# Altium PCB ArmbandControllerHardware PCB_RevA.PcbDoc
Units mil, origin at the board's own origin, x right, y up, seen from the top; angles counter-clockwise.
Board outline 1000 x 2205 mil, 6 copper layers (Sig 1, GND 1, Sig 2, PWR (3V3), GND 2, Sig 3), stack 62.874 mil thick; 48 components, 40 nets, 265 pads, 59 vias.
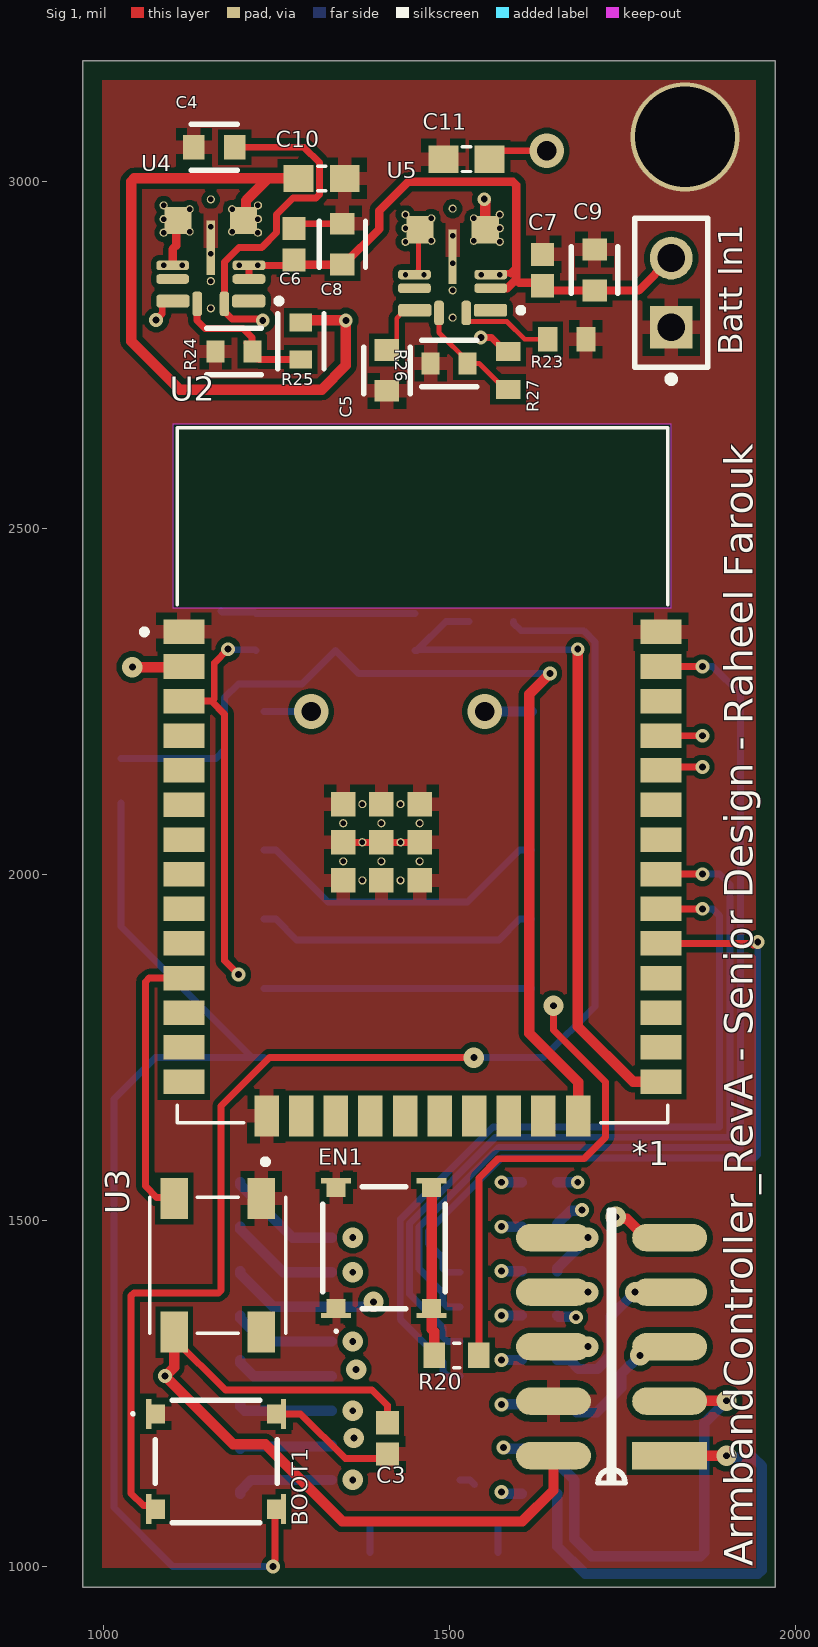
[diagram p0: Sig 1 view]
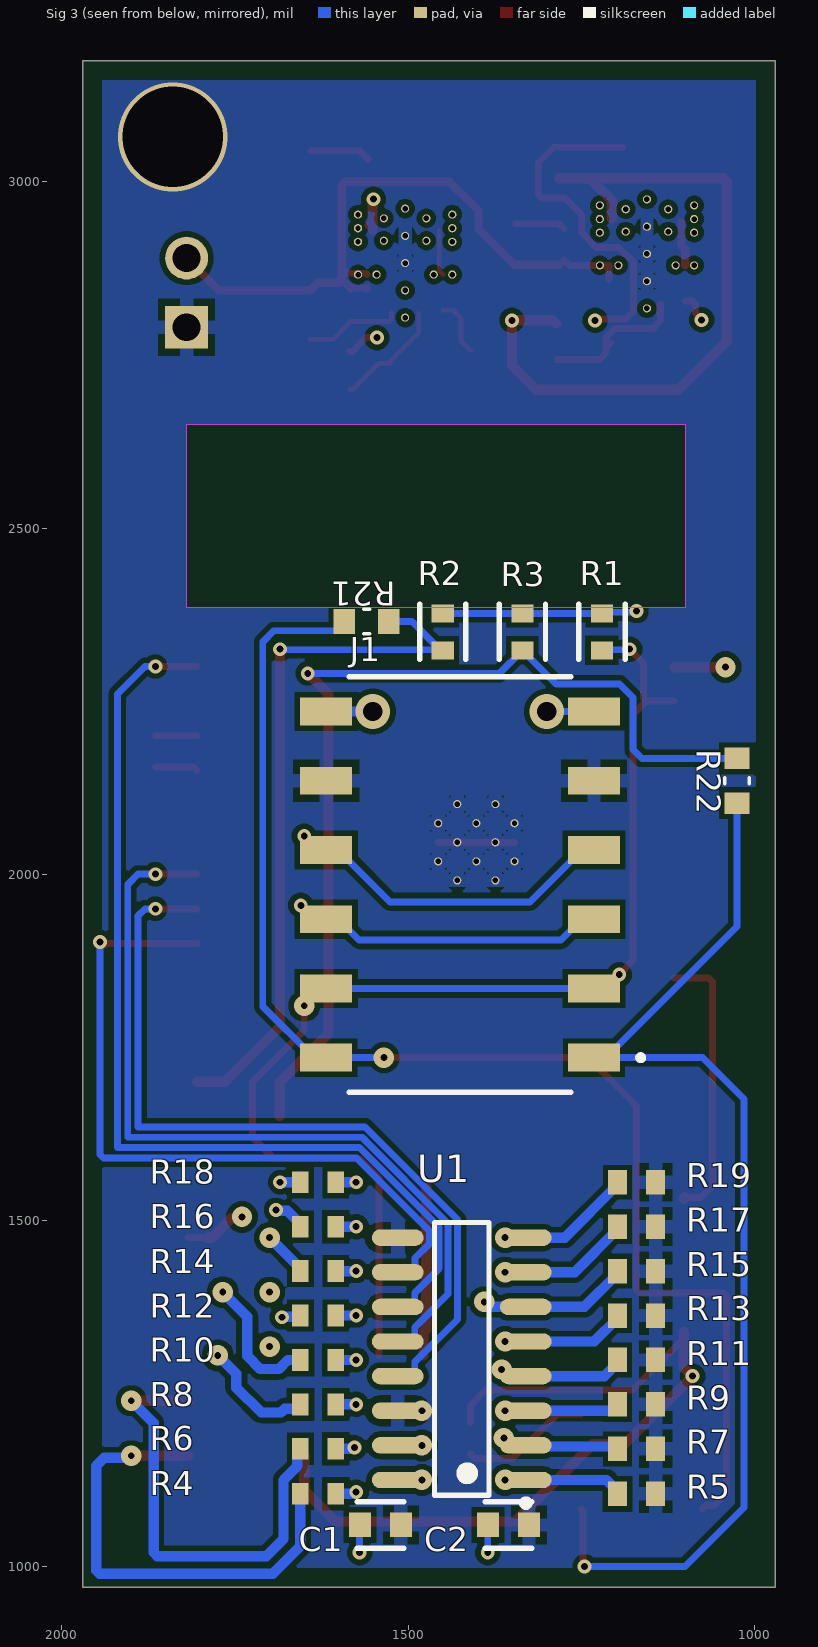
[diagram p1: Sig 3 view, seen from below]
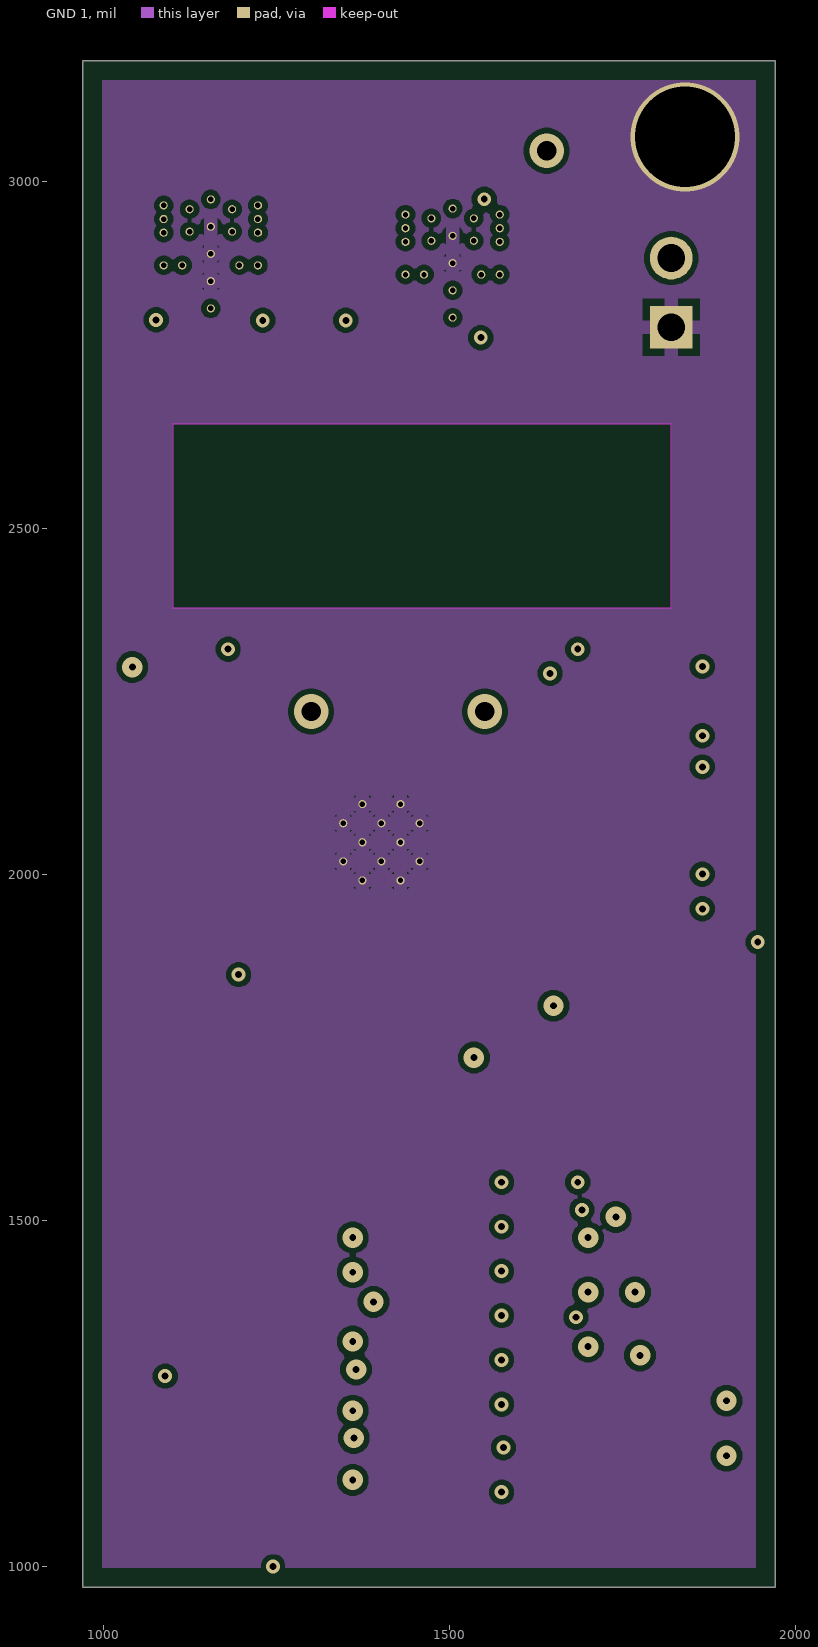
[diagram p2: GND 1]
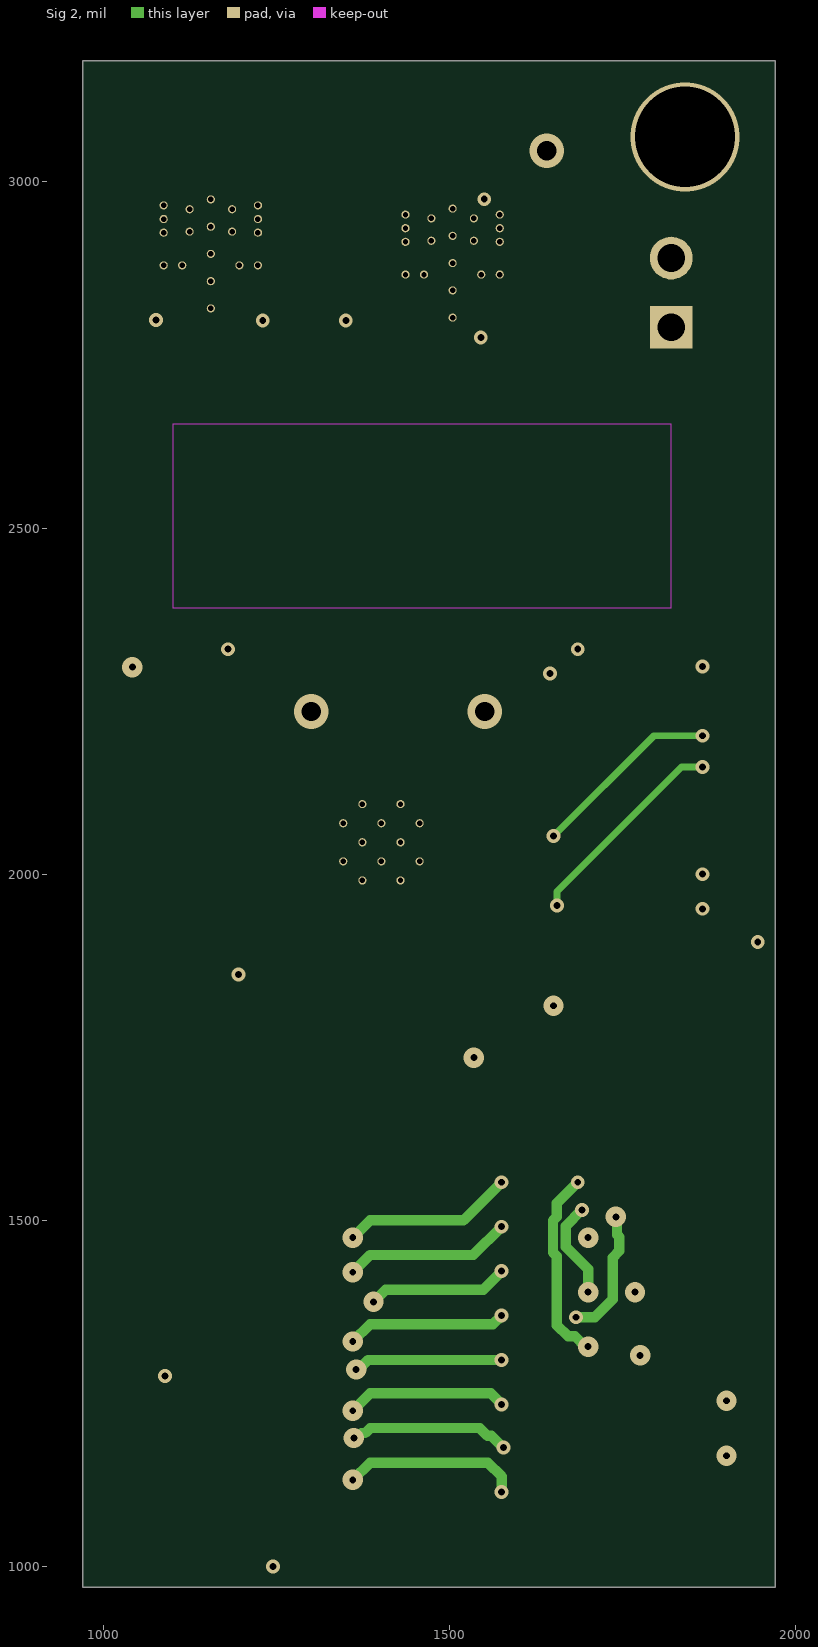
[diagram p3: Sig 2]
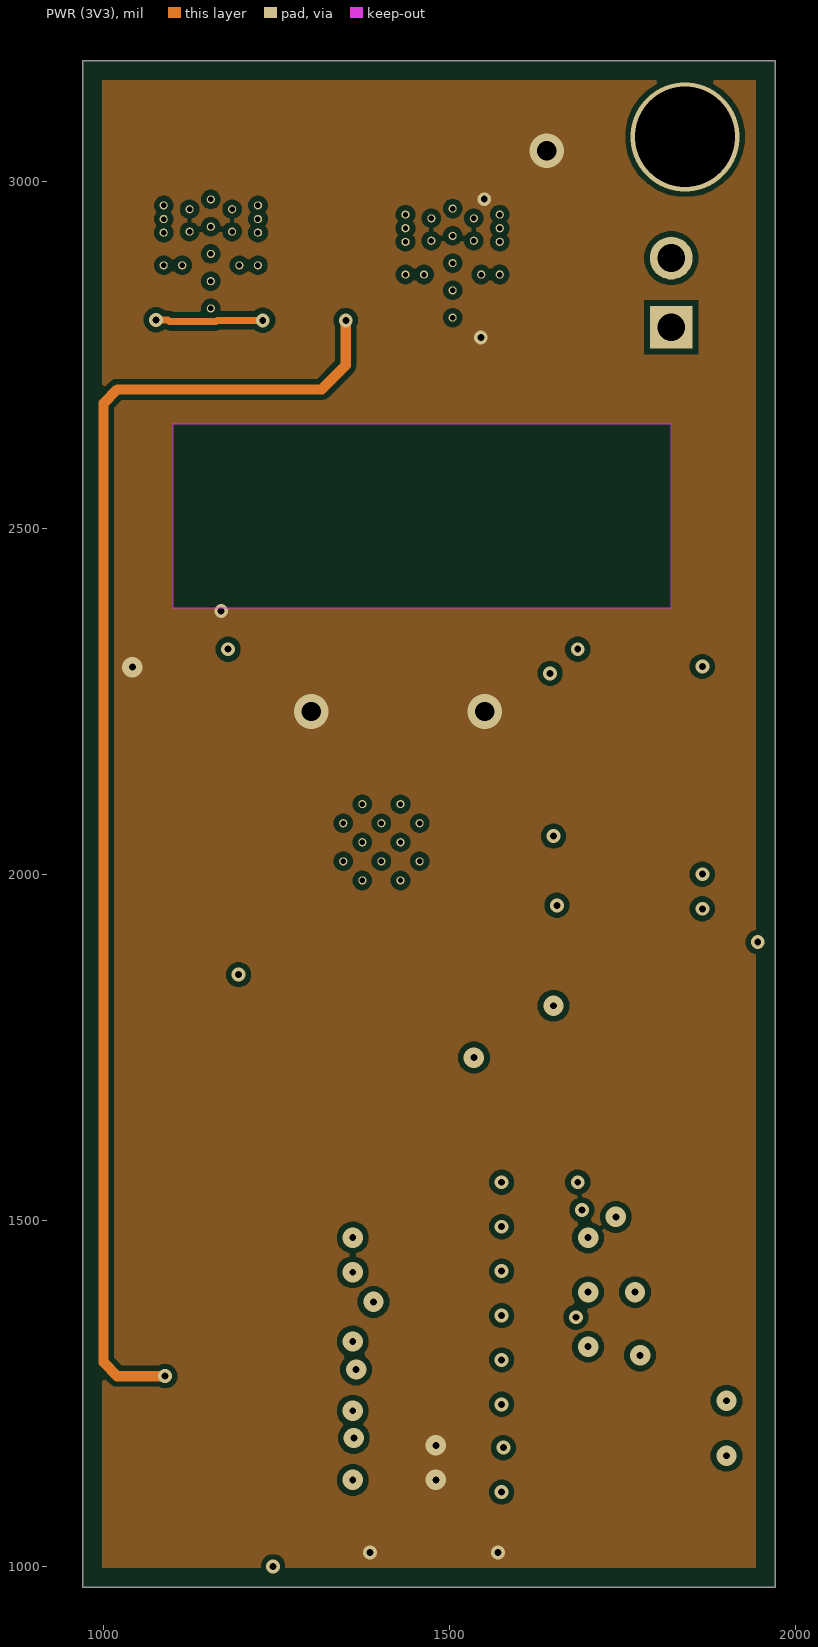
[diagram p4: PWR (3V3)]
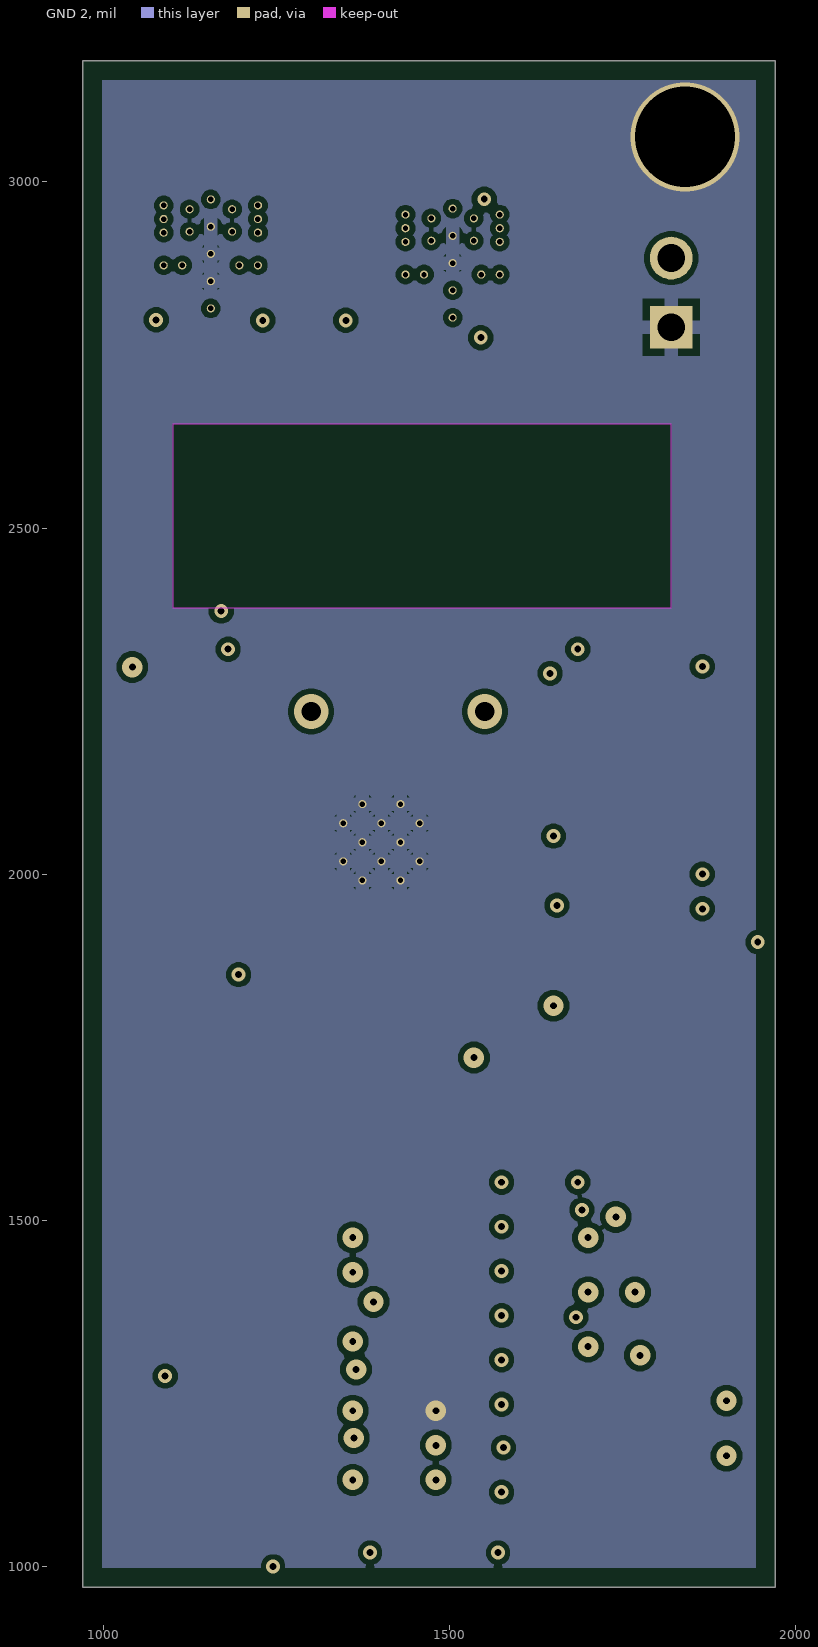
[diagram p5: GND 2]
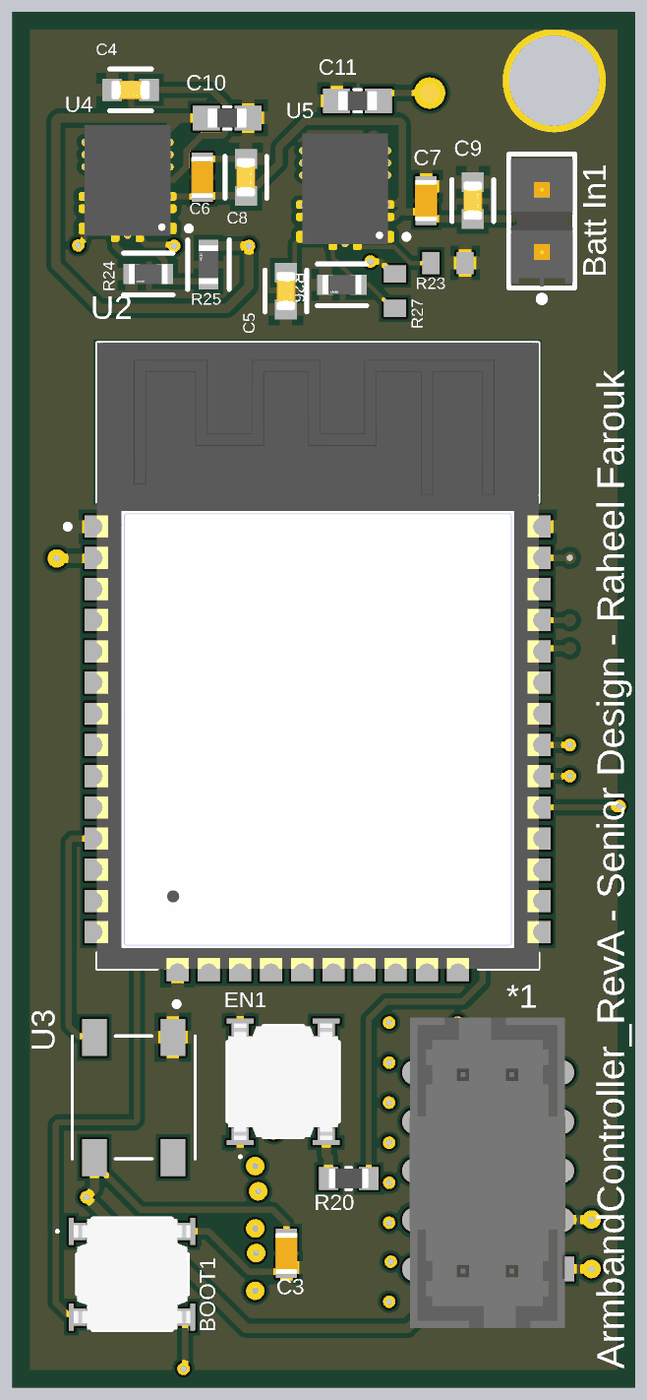
[diagram p6: 3D render of the assembled board from above, using the file's embedded part models]

## Layer stack, top to bottom
Top Mask: solder mask 0.591, Solder Resist, Dk 3.8
Sig 1: signal copper 1.378
Dielectric 1: prepreg 3.937, 2313, Dk 4.05
GND 1: signal copper 0.689
Core 1: core 22.244, FR-4, Dk 4.5
Sig 2: signal copper 0.689
Dielectric 2: prepreg 5, 2116, Dk 4.25
PWR (3V3): signal copper 0.689
Core 2: core 22.244, FR-4, Dk 4.5
GND 2: signal copper 0.689
Dielectric 3: prepreg 3.937, 2313, Dk 4.05
Sig 3: signal copper 1.378
Bottom Mask: solder mask 0.591, Solder Resist, Dk 3.8

## Board outline
970,970 1970,970 1970,3175 970,3175

## Design rules (kind name [scope] priority, off if disabled: settings)
BoardOutlineClearance [All] p1: gap=11.81 ignorepadtopadclearanceinfootprint=FALSE except(15.75: Arc-SplitBarrior Arc-SplitContinuation Track-SplitBarrior Track-SplitContinuation SMDPad-SplitBarrior SMDPad-SplitContinuation THPad-SplitBarrior THPad-SplitContinuation Via-SplitBarrior Via-SplitContinuation Fill-SplitBarrior Fill-SplitContinuation Poly-SplitBarrior Poly-SplitContinuation Region-SplitBarrior Region-SplitContinuation Text-SplitBarrior Text-SplitContinuation)
Clearance "Clearance Different Nets" [All] p1: gap=7.87 ignorepadtopadclearanceinfootprint=FALSE except(3.5: Arc-Arc Arc-Track Arc-SMDPad Track-Track Track-SMDPad; 5: SMDPad-SMDPad SMDPad-Via THPad-Via Via-Via; 10: Arc-Via Arc-Text Track-Via Track-Text SMDPad-Text THPad-Text Via-Text Fill-Text Poly-Text Region-Text Text-Text; 19.68: THPad-THPad Via-Hole)
Clearance "Clearance Same Nets" [All] p2: gap=7.87 ignorepadtopadclearanceinfootprint=FALSE except(3.5: Arc-Arc Arc-Track Arc-SMDPad Track-Track Track-SMDPad SMDPad-SMDPad; 5: SMDPad-Via THPad-Via; 10: Arc-Via Arc-Text Track-Via Track-Text SMDPad-Text THPad-Text Via-Via Via-Text Fill-Text Poly-Text Region-Text Text-Text)
Clearance "Clearance Bottom Layer" [OnLayer('Bottom Layer')] p3: gap=8 ignorepadtopadclearanceinfootprint=TRUE except(10: Arc-Text Track-Text SMDPad-Text THPad-Text Via-Text Fill-Text Poly-Text Region-Text Text-Text)
Clearance "Clearance Top Layer" [OnLayer('Top Layer')] p4: gap=8 ignorepadtopadclearanceinfootprint=TRUE except(10: Arc-Text Track-Text SMDPad-Text THPad-Text Via-Text Fill-Text Poly-Text Region-Text Text-Text)
HoleSize [All] p1: absolutevalues=TRUE maxlimit=248.03 minlimit=7.87 maxpercent=80.000 minpercent=20.000
MinimumAnnularRing [All] p1: minimumring=5.12
MinimumSolderMaskSliver [All] p1: minsoldermaskwidth=3.94
PolygonConnect PolygonConnect_1 [All] p1: thpad.connectstyle=Relief thpad.reliefconductorwidth=20 thpad.reliefentries=4 thpad.polygonreliefangle="90 Angle" thpad.airgapwidth=10 smdpad.connectstyle=Relief smdpad.reliefconductorwidth=20 smdpad.reliefentries=4 smdpad.polygonreliefangle="90 Angle" smdpad.airgapwidth=10 via.connectstyle=Direct via.reliefconductorwidth=20 via.reliefentries=4 via.polygonreliefangle="90 Angle" via.airgapwidth=10
RoutingCorners [All] p1: cornerstyle=Round minsetback=100 maxsetback=100
RoutingVias [All] p1: holewidth=19.68 width=39.37 viastyle="Through Hole" minholewidth=7.87 minwidth=13.78 maxholewidth=39.37 maxwidth=78.74
SilkToSilkClearance [All] p1: silktosilkclearance=3.94
SilkToSolderMaskClearance [IsPad] p1: minsilkscreentomaskgap=3.94 clearancetoexposedcopper=TRUE
SolderMaskExpansion [All] p1: expansion=4 istentingtop=FALSE
SupplyNets "Schematic Supply Nets_2" [InNet('GND')] p1: voltage=0.000
SupplyNets "Schematic Supply Nets_1" [InNet('+5V0')] p2: voltage=0.000
SupplyNets "Schematic Supply Nets" [InNet('+3V3')] p3: voltage=0.000
Width [All] p1: maxlimit=100 minlimit=3.5 preferedwidth=10 minimp=50.000000 maximp=50.000000 favimp=50.000000
25 further rules are at their usual default settings.

## Classes and differential pairs
component class "Power Schematic": C4 C5 C6 C7 C8 C9 C10 C11 R23 R24 R25 R26 R27 U4 U5
component class MCU: C1 C2 R1 R2 R3 R4 R5 R6 R7 R8 R9 R10 R11 R12 R13 R14 R15 R16 R17 R18 R19 U1 U2
component class "Buttons, LEDs and Connectors": *1 "Batt In1" BOOT1 C3 EN1 J1 R20 R21 R22 U3

## Components (designator, comment, footprint, x,y, rotation, side; value= is the part's Value field where it differs from the comment)
*1 "MOLEX 0878321006" "MOLEX 0878321006" 1817.72,1160 r180 top
"Batt In1" "TSW-102-07-F-S" FP-TSW-102-07-F-S-MFG 1820,2840 r90 top
BOOT1 "RKA2SGK055SMTR_LFS" RKA2SGK055SMTRLFS 1162.56,1151.61 r0 top
C1 "1uF 0603" FP-CC0603-DA-MFG 1540,1060 r180 bottom value="1 uF"
C2 "1uF 0603" FP-CC0603-DA-MFG 1355,1060 r180 bottom value="1 uF"
C3 "0.1uF 0603" CAPC1608X90X40LL10T20 1410,1185 r90 top
C4 "1uF 0603" FP-CC0603-DA-MFG 1160,3050 r0 top value="1 uF"
C5 "1uF 0603" FP-CC0603-DA-MFG 1409.29,2727.72 r90 top value="1 uF"
C6 "0.1uF 0603" CAPC1608X90X40LL10T20 1275,2910 r270 top
C7 "0.1uF 0603" CAPC1608X90X40LL10T20 1634.29,2872.72 r270 top
C8 "4.7uF 0603" FP-CC0603-DA-MFG 1345,2910 r90 top value="4.7 uF"
C9 "4.7uF 0603" FP-CC0603-DA-MFG 1709.29,2872.72 r90 top value="4.7 uF"
C10 "22uF 0603" CAPC1608X90 1315,3005 r0 top
C11 "22uF 0603" CAPC1608X90 1524.29,3032.72 r180 top
EN1 "RKA2SGK055SMTR_LFS" RKA2SGK055SMTRLFS 1405,1460 r90 top
J1 "SSM-106-L-SH" SAMTEC_SSM-106-L-SH 1425,1985 r90 bottom
R1 "10k 0603" FP-RC0603-0_55-IPC_C 1220,2350 r90 bottom
R2 "10k 0603" FP-RC0603-0_55-IPC_C 1450,2350 r90 bottom
R3 "10k 0603" FP-RC0603-0_55-IPC_C 1335,2350 r90 bottom
R4 "33k 0603" RESC1608X55X25LL10T15 1630,1105 r180 bottom
R5 "17.4k 0603" RESC1608X55X25NL10T15 1170,1105 r0 bottom
R6 "33k 0603" RESC1608X55X25LL10T15 1630,1170 r180 bottom
R7 "17.4k 0603" RESC1608X55X25NL10T15 1170,1170 r0 bottom
R8 "33k 0603" RESC1608X55X25LL10T15 1630,1234.17 r180 bottom
R9 "17.4k 0603" RESC1608X55X25NL10T15 1170,1234.17 r0 bottom
R10 "33k 0603" RESC1608X55X25LL10T15 1630,1298.33 r180 bottom
R11 "17.4k 0603" RESC1608X55X25NL10T15 1170,1298.33 r0 bottom
R12 "33k 0603" RESC1608X55X25LL10T15 1630,1362.5 r180 bottom
R13 "17.4k 0603" RESC1608X55X25NL10T15 1170,1362.5 r0 bottom
R14 "33k 0603" RESC1608X55X25LL10T15 1630,1426.67 r180 bottom
R15 "17.4k 0603" RESC1608X55X25NL10T15 1170,1426.67 r0 bottom
R16 "33k 0603" RESC1608X55X25LL10T15 1630,1490.83 r180 bottom
R17 "17.4k 0603" RESC1608X55X25NL10T15 1170,1490.83 r0 bottom
R18 "33k 0603" RESC1608X55X25LL10T15 1630,1555 r180 bottom
R19 "17.4k 0603" RESC1608X55X25NL10T15 1170,1555 r0 bottom
R20 "RC0603FR-07470RP" RESC1608X55N 1510,1305 r0 top
R21 "RC0603FR-07470RP" RESC1608X55N 1560,2365 r180 bottom
R22 "RC0603FR-07470RP" RESC1608X55N 1025,2135 r90 bottom
R23 "20k 0603" RESC1608X55X25NL10T15 1669.29,2772.72 r180 top
R24 "10k 0603" FP-RC0603-0_55-IPC_C 1188.36,2755 r180 top
R25 "40.2k 0603" FP-RC0603-0_55-IPC_C 1285,2770 r90 top
R26 "10k 0603" FP-RC0603-0_55-IPC_C 1499.29,2737.72 r180 top
R27 "23.2k 0603" RESC1608X55X25NL10T15 1584.29,2727.72 r90 top
U1 "MCP3208T-CI/SL" SOIC-SL16_L 1422.52,1300 r0 bottom
U2 "ESP32-WROOM-32E_(16MB)" XCVR_ESP32-WROOM-32E_(16MB) 1460.51,2142.91 r0 top
U3 "FZ2812-5050" LED_FZ2812-5050 1165,1435 r270 top
U4 "TLVM23625RDNR" CONV_TLVM23625RDNR 1155,2905 r180 top
U5 "TLVM23625RDNR" CONV_TLVM23625RDNR 1504.29,2891.77 r180 top

## Footprints (in the part's own frame and the unit in brackets; to place one, negate y for a bottom-side part, rotate by r counter-clockwise, add the part's x,y. Pads: shape width x height; smd on the part's side, far side on the other; paste and mask are expansions set on the pad)
CAPC1608X90 [mm]
  rect 1.1x1 smd: 1(-0.85,0) 2(0.85,0)
  silkscreen extent -0.15,-0.45 0.15,0.45, body extent -0.8,-0.4 0.8,0.4, height 0.9
CAPC1608X90X40LL10T20 [mm] "Chip Capacitor, 2-Leads, Body 1.70x0.90mm, IPC High Density"
  rect 0.85x0.85 smd: 1(-0.575,0) 2(0.575,0)
  body extent -0.85,-0.45 0.85,0.45, height 0.9
CONV_TLVM23625RDNR [mm]
  rrect45% 1.225x0.47 smd paste-2 mask+0: 1(-1.388,1.96) 8(1.388,1.96)
  rrect60% 1.2x0.35 smd paste-2 mask+0: 2(-1.4,1.15) 3(-1.4,0.65) 6(1.4,0.65) 7(1.4,1.15)
  round 0.3 hole 0.2 mask+0: 3_1(-1.729,0.65) 3_2(-1.05,0.65) 4_1(-1.73,-0.55) 4_2(-1.73,-1.05) 4_3(-1.73,-1.55) 4_4(-0.78,-0.59) 4_5(-0.78,-1.41) 5_1(1.73,-0.55) 5_2(1.73,-1.05) 5_3(1.73,-1.55) 5_4(0.78,-0.59) 5_5(0.78,-1.41) 6_1(1.729,0.65) 6_2(1.05,0.65) 10_1(0,2.23) 10_2(0,1.23) 10_3(0,0.23) 10_4(0,-0.77) 10_5(0,-1.77)
  rect 1x1 smd paste-1 mask+0: 4(-1.2,-0.995) 5(1.2,-0.995)
  rrect60% 0.35x0.9 smd paste-1 mask+0: 9(0.5,2.06) 11(-0.5,2.06)
  rect 0.3x2 smd paste-2 mask+0: 10(0,0)
  silkscreen extent -2.6,1.86 -2.4,2.06, body extent -1.75,-2.25 1.75,2.25, height 2.1
FP-CC0603-DA-MFG [mm]
  rect 0.8x0.9 smd paste+0 mask+0: 1(-0.75,0) 2(0.75,0)
  silkscreen extent -0.85,-0.85 0.85,0.85, body extent -0.8,-0.4 0.8,0.4, height 0.9
FP-RC0603-0_55-IPC_C [mil]
  rect 25.93x31.97 smd paste+0 mask+0: 1(-26.64,0) 2(26.64,0)
  silkscreen extent -40,-33 40,33, body extent -31,-16 31,16, height 22
FP-TSW-102-07-F-S-MFG [mm]
  rect 1.57x1.57 hole 1.02 paste-2539.97 mask+0: 1(-1.27,0)
  round 1.57 hole 1.02 paste-2539.97 mask+0: 2(1.27,0)
  silkscreen extent -3.3,-1.34 2.73,1.34, body extent -2.83,-1.44 2.83,1.44, height 0.25
LED_FZ2812-5050 [mm]
  rect 1.5x1 smd: 1(-2.45,1.6) 2(-2.45,-1.6) 3(2.45,-1.6) 4(2.45,1.6)
  silkscreen extent -3.9,-2.5 2.5,2.5
"MOLEX 0878321006" [mm]
  rect 2.75x1 smd: 1(0,0)
  oval 2.75x1 smd: 2(0,-2) 3(0,-4) 4(0,-6) 5(0,-8) 6(4.26,-8) 7(4.26,-6) 8(4.26,-4) 9(4.26,-2) 10(4.26,0)
  round 1 on Mech1: 3(2.13,-1) 3(2.13,-7)
  silkscreen extent 1.63,-9 2.63,1, body extent -1.02,-10.24 5.33,2.41, height 9.05
RESC1608X55N [mm]
  rect 0.79x0.93 smd: 1(-0.82,0) 2(0.82,0)
  silkscreen extent -0.11,-0.45 0.11,0.45, body extent -0.8,-0.4 0.8,0.4, height 0.45
RESC1608X55X25LL10T15 [mm] "Chip Resistor, 2-Leads, Body 1.60x0.80mm, IPC High Density"
  rect 0.6x0.8 smd: 1(-0.65,0) 2(0.65,0)
  body extent -0.85,-0.45 0.85,0.45, height 0.55
RESC1608X55X25NL10T15 [mm] "Chip Resistor, 2-Leads, Body 1.60x0.80mm, IPC Medium Density"
  rect 0.7x0.9 smd: 1(-0.7,0) 2(0.7,0)
  body extent -0.85,-0.45 0.85,0.45, height 0.55
RKA2SGK055SMTRLFS [mm]
  rect 0.7x0.7 smd: 1(-2.225,1.75) 2(2.225,1.75) 3(-2.225,-1.75) 4(2.225,-1.75)
  rect 0.2x0.2 smd: 5(-2.475,2.2) 6(-2.475,1.3) 7(2.475,2.2) 8(2.475,1.3) 9(-2.475,-1.3) 10(-2.475,-2.2) 11(2.475,-1.3) 12(2.475,-2.2)
  silkscreen extent -3.1,-2.25 2.25,2.25, body extent -2.37,-2.25 2.37,2.25, height 0.55
SAMTEC_SSM-106-L-SH [mm]
  rect 1.02x1.905 smd: 01_1(-6.35,-4.913) 01_2(-6.35,4.913) 02_1(-3.81,-4.913) 02_2(-3.81,4.913) 03_1(-1.27,-4.913) 03_2(-1.27,4.913) 04_1(1.27,-4.913) 04_2(1.27,4.913) 05_1(3.81,-4.913) 05_2(3.81,4.913) 06_1(6.35,-4.913) 06_2(6.35,4.913)
  silkscreen extent -7.62,-6.72 7.62,4.07
SOIC-SL16_L [mm] "SOIC, 16-Leads, Body 9.9x3.9mm, Pitch 1.27mm, IPC High Density"
  oval 1.9x0.6 smd: 1(-2.35,4.445) 2(-2.35,3.175) 3(-2.35,1.905) 4(-2.35,0.635) 5(-2.35,-0.635) 6(-2.35,-1.905) 7(-2.35,-3.175) 8(-2.35,-4.445) 9(2.35,-4.445) 10(2.35,-3.175) 11(2.35,-1.905) 12(2.35,-0.635) 13(2.35,0.635) 14(2.35,1.905) 15(2.35,3.175) 16(2.35,4.445)
  silkscreen extent -2.47,-5 1,5.42, body extent -2,-5 2,5, height 1.75
XCVR_ESP32-WROOM-32E_(16MB) [mm]
  rect 1.5x0.9 smd: 1(-8.75,5.26) 2(-8.75,3.99) 3(-8.75,2.72) 4(-8.75,1.45) 5(-8.75,0.18) 6(-8.75,-1.09) 7(-8.75,-2.36) 8(-8.75,-3.63) 9(-8.75,-4.9) 10(-8.75,-6.17) 11(-8.75,-7.44) 12(-8.75,-8.71) 13(-8.75,-9.98) 14(-8.75,-11.25) 25(8.75,-11.25) 26(8.75,-9.98) 27(8.75,-8.71) 28(8.75,-7.44) 29(8.75,-6.17) 30(8.75,-4.9) 31(8.75,-3.63) 32(8.75,-2.36) 33(8.75,-1.09) 34(8.75,0.18) 35(8.75,1.45) 36(8.75,2.72) 37(8.75,3.99) 38(8.75,5.26)
  rect 0.9x1.5 smd: 15(-5.715,-12.5) 16(-4.445,-12.5) 17(-3.175,-12.5) 18(-1.905,-12.5) 19(-0.635,-12.5) 20(0.635,-12.5) 21(1.905,-12.5) 22(3.175,-12.5) 23(4.445,-12.5) 24(5.715,-12.5)
  rect 0.9x0.9 smd: 39_1(-2.9,-1.06) 39_2(-1.5,-1.06) 39_3(-0.1,-1.06) 39_4(-2.9,-2.46) 39_5(-1.5,-2.46) 39_6(-0.1,-2.46) 39_7(-2.9,-3.86) 39_8(-1.5,-3.86) 39_9(-0.1,-3.86)
  round 0.3 hole 0.2 mask+0: 39_10(-2.2,-1.06) 39_11(-0.8,-1.06) 39_12(-2.9,-1.76) 39_13(-1.5,-1.76) 39_14(-0.1,-1.76) 39_15(-2.2,-2.46) 39_16(-0.8,-2.46) 39_17(-2.9,-3.16) 39_18(-1.5,-3.16) 39_19(-0.1,-3.16) 39_20(-2.2,-3.86) 39_21(-0.8,-3.86)
  silkscreen extent -10.3,-12.75 9,12.75, body extent -9,-12.75 9,12.75, height 3.25

## Part data
"Batt In1": library part CMP-02766-001458-1, "CONN HEADER VERT 2POS 2.54MM", Color=Black, Flammability Rating="UL94 V-0", Max Current Rating=7.6A, Max Operating Temperature=125°C, Max Voltage Rating (AC)=550V, Min Operating Temperature=-55°C, Package Quantity=1, Connector Type=Header, Contact Finish - Mating=GOLD, Contact Material=Bronze, Contact Mating Length=0.23inch, Contact Plating=Gold, Contact Shape=Square, Contact Type="Male Pin", Depth=2.54mm, Fastening Type=Pull, Gender=Male, Housing Color=Black, Housing Material=Polyester, Insulation Color=Black, Insulation Material=PBT, Length=5.08mm, Mount="Through Hole", Number of Contacts=2, Number of Positions=2, Number of Rows=1, Orientation=Straight, Packaging=Bulk, Pitch=2.54mm, Radiation Hardening=No, REACH SVHC="No SVHC", RoHS Compliant=Yes, Series=TSW, Termination=Solder
BOOT1 EN1: "Switch", Arrow Part Number="RKA2SGK055SMTR LFS", Manufacturer_Name="C & K COMPONENTS", Mouser Part Number=611-RKA2SGK055SMTRLF, Arrow Price/Stock=https://www.arrow.com/en/products/rka2sgk055smtr-lfs/ck?region=europe, Datasheet Link=https://www.ckswitches.com/media/3130/ck_rk_datasheet.pdf, Height=0.55mm, Manufacturer_Part_Number="RKA2SGK055SMTR LFS", Mouser Price/Stock=https://www.mouser.co.uk/ProductDetail/CK/RKA2SGK055SMTR-LFS?qs=iLbezkQI%252BsiGAt%252Bzcl2zSQ%3D%3D
C1 C2 C4 C5: library part CMP-03422-000612-1, "CAP CER 1UF 25V X5R 0603", Capacitance="1 uF", Manufacturer=YAGEO, Manufacturer Part Number=CC0603KRX5R8BB105, Package=CC0603-DA, Temperature="-55°C to +125°C", Temperature Characteristic=X5R, Temperature Coefficient=15%, Temperature Range High=+125°C, Temperature Range Low=-55°C, Tolerance=0.1, Voltage="25 V", Automotive=No, Category=Cap, ComponentLink2Description=Datasheet, ComponentLink2URL=http://www.yageo.com/documents/recent/UPY-GPHC_X7R_6.3V-to-50V_18.pdf, Device Class L1="Passive Components", Device Class L2=Capacitors, Device Class L3="Ceramic Capacitors", Digikey Description="CAP CER 1UF 25V X5R 0603", Footprint Url=http://www.yageo.com/exep/pages/download/literatures/UPY-C_GEN_24.pdf, Height=0.9mm, Lead Free=Yes, Material=Ceramic, Mouser Description="Multilayer Ceramic Capacitors MLCC - SMD/SMT 1.0uF 25V X5R 10%", Octopart=https://octopart.com/cc0603krx5r8bb105-yageo-9292811, RoHS=TRUE, Voltage Rating="25 V"
C3 C6 C7: library part CMP-1035-02594-2, "Chip Capacitor, 100 nF, - 20% to + 80%, 50 V, -30 to 85 degC, 0603 (1608 Metric), RoHS, Tape and Reel", Capacitance=0.1µF, Manufacturer=Yageo, Operating Temperature=-30°C~85°C, Package / Case=0603(1608Metric), Package Description="2-Pin Surface Mount Device, Body 1.6 x 0.8 mm", Package Reference=0603, Ratings=-, Standard Package=1, Temperature Coefficient=Y5V(F), Tolerance=-20%,+80%, Voltage - Rated=50V, Applications=GeneralPurpose, Category=Capacitors, Datasheet URL=https://datasheet.ciiva.com/17434/upy-gphc-y5v-6-3v-to-50v-5-17434523.pdf, Datasheet Version="Rev. 5, 07/2010", Family=CeramicCapacitors, Featured Product=CommodityMultilayerCeramicCapacitors–CCSeries, Features=-, Height - Seated (Max)=-, Kits=CC060300000000000-ND-MLCC0603SAMPLEKIT, Lead Spacing=-, Lead Style=-, Manufacturer URL=http://www.yageo.com/, Mounting Technology=SurfaceMount, Mounting Type=SurfaceMount,MLCC, Online Catalog=CCSeries, Other Names=311-1343-1, Packaging=CutTape(CT), Product Training Modules=MultilayerCeramicCapacitors, Series=CC, Size / Dimension="0.063\"Lx0.031\"W(1.60mmx0.80mm)", Thickness (Max)="0.035\"(0.90mm)"
C8 C9: library part CMP-03422-001236-1, "CAP CER 4.7UF 16V X5R 0603", Capacitance="4.7 uF", Manufacturer=YAGEO, Manufacturer Part Number=CC0603KRX5R7BB475, Package=CC0603-DA, Temperature="-55°C to +125°C", Temperature Characteristic=X5R, Temperature Coefficient=15%, Temperature Range High=+125°C, Temperature Range Low=-55°C, Tolerance=0.1, Voltage="16 V", Automotive=No, Category=Cap, ComponentLink2Description=Datasheet, ComponentLink2URL=http://www.yageo.com/documents/recent/UPY-GPHC_X7R_6.3V-to-50V_18.pdf, Device Class L1="Passive Components", Device Class L2=Capacitors, Device Class L3="Ceramic Capacitors", Digikey Description="CAP CER 4.7UF 16V X5R 0603", Footprint Url=http://www.yageo.com/exep/pages/download/literatures/UPY-C_GEN_24.pdf, Height=0.9mm, Lead Free=Yes, Material=Ceramic, Mouser Description="Multilayer Ceramic Capacitors MLCC - SMD/SMT 4.7uF 16V X5R 10%", Octopart=https://octopart.com/cc0603krx5r7bb475-yageo-34978295, RoHS=TRUE, Voltage Rating="16 V"
C10 C11: library part CC0603MRX5R6BB226, "Cap Ceramic 22uF 10V X5R 20% SMD 0603 85Â°C Paper T/R", Package=None, Availability=Unavailable, MF="{'manufacturer': u'Yageo'}", MP=CC0603MRX5R6BB226, Price=None
J1 U2 U3 U4 U5: Package=None, Availability=Unavailable, Price=None
  J1: MF="{'manufacturer': u'Samtec'}", MP=SSM-106-L-SH
  U2: MF="{'manufacturer': u'Espressif Systems'}", MP=ESP32-WROOM-32E_(16MB)
  U3: MF="{'manufacturer': u'Feztek'}", MP=FZ2812-5050
  U4 U5: MF="{'manufacturer': u'Texas Instruments'}", MP=TLVM23625RDNR
R1 R2 R3 R24 R26: library part CMP-2100-03664-2, "RES 10K OHM 1% 1/10W 0603", Case Code (Imperial)=0603, Case Code (Metric)=1608, Max Operating Temperature=155°C, Max Power Dissipation=100mW, Min Operating Temperature=-55°C, Resistance=10kR, Resistance Tolerance=1%, Resistor Type="Thick Film", Temperature Coefficient=100ppm/°C, Voltage Rating=75V, Voltage Rating (DC)=50V, Case/Package=0603, Construction=Rectangular, Depth=0.8mm, Features="Moisture Resistant", Height=0.45mm, Lead Free="Lead Free", Lead Pitch=0.3mm, Length=1.6mm, Military Standard=Not, Number of Pins=2, Number of Terminations=2, Packaging="Tape and Reel", Power Rating=100mW, RoHS Compliant=Yes, Series=RC, Size Code=0603, Termination=SMD/SMT, Tolerance=1%, Weight=7.1E-05oz, Width=0.8mm
R4 R6 R8 R10 R12 R14 R16 R18: library part CMP-2000-06939-1, "Chip Resistor, 33 Ohm, +/- 1%, 0.1 W, -55 to 155 degC, 0603 (1608 Metric), RoHS, Tape and Reel", Case Code - in=0603, Case Code - mm=1608, Manufacturer=Yageo, Operating Temperature Range=-55Cto+155C, Package / Case=0603(1608metric), Package Description="2-Pin Surface Mount Device, Body 1.6 x 0.8 mm", Power Rating=100mW, Resistance=33Ohms, Temperature Coefficient=100PPM/C, Tolerance=1%, Voltage Rating=75V, Brand=Yageo, Datasheet URL=http://www.yageo.com/documents/recent/PYu-RC_Group_51_RoHS_L_7.pdf, Datasheet Version="Rev. 7, 05/2017", Height=0.45mm, Length=1.6mm, Manufacturer URL=http://www.yageo.com/, Mounting Technology=SurfaceMount, Package Reference=0603, Packaging=Reel, Product=ThickFilmResistorsGeneralPurpose, Product Category=ThickFilmResistors, RoHS=True, Series=RC, Termination Style=SMD/SMT, Type=GeneralPurposeChipResistorSurfaceMount, Unit Weight=0.000071oz, Width=0.8mm
R5 R7 R9 R11 R13 R15 R17 R19: library part CMP-2000-03920-1, Manufacturer=Yageo, Part Number=RC0603FR-0717K4L
R20 R21 R22: "RES SMD 470 OHM 1% 1/10W 0603", Package=None, Availability=Unavailable, MF="{'manufacturer': u'Yageo Corporation'}", MP=RC0603FR-07470RP, Price=None
R23: library part CMP-2000-04254-1, Manufacturer=Yageo, Part Number=RC0603JR-0720RL
R25: library part CMP-03412-037816-1, "RES 40.2K OHM 1% 1/10W 0603", Case Code (Imperial)=0603, Case Code (Metric)=1608, Max Operating Temperature=155°C, Max Power Dissipation=100mW, Min Operating Temperature=-55°C, Resistance=40.2kR, Resistor Type="Thick Film", Temperature Coefficient=100ppm/°C, Tolerance=1%, Voltage Rating=50V, Working Voltage=75V, Case/Package=0603, Construction=Rectangular, Depth=0.8mm, Features="Moisture Resistant", Height=0.45mm, Lead Free="Lead Free", Length=1.6mm, Military Standard=Not, Mount="Surface Mount", Number of Terminations=2, Packaging="Tape and Reel", Power Rating=100mW, RoHS Compliant=Yes, Series=RC, Technology="METAL OXIDE FILM", Termination=SMD/SMT, Voltage Rating (DC)=50V, Width=0.8mm
R27: library part CMP-2000-03962-1, Manufacturer=Yageo, Part Number=RC0603FR-0723K2L
U1: library part CMP-0188-00450-2, "2.7V 4-Channel/8-Channel 12-Bit A/D Converters with SPI Serial Interface, 16-Pin SOIC 150mil, C Performance Grade, Industrial Temperature, Tape and Reel", Code_IPC=SOIC127P600-16, Code_JEDEC=MS-012-AC, ComponentLink1Description="Manufacturer URL", ComponentLink1URL=http://www.microchip.com/, ComponentLink2Description=Datasheet, ComponentLink2URL=http://ww1.microchip.com/downloads/en/DeviceDoc/21298e.pdf, ComponentLink3Description="Package Specification", ComponentLink3URL=http://www.microchip.com/stellent/groups/techpub_sg/documents/packagingspec/en012702.pdf, DatasheetVersion="revE, Sep-2008", PackageDescription="16-Lead Plastic Small Outline (SL) - Narrow, 3.90mm Body [SOIC]", PackageReference=SOIC-SL16, PackageVersion="revBB, Aug-2009", RevisionNote="URLs added."

## Via types
v1: diameter 20, hole 10, Sig 1 to Sig 3, 20 vias
v2: diameter 29.53, hole 10, Sig 1 to Sig 3, 18 vias
v3: diameter 20, hole 10, Sig 1 to Sig 3, tented top, 6 vias
v4: diameter 50, hole 28, Sig 1 to Sig 3, 2 vias
v5: diameter 20, hole 10, PWR (3V3) to Sig 3, 2 vias
v6: diameter 20, hole 10, Sig 2 to Sig 3, tented top, 2 vias
v7: diameter 20, hole 10, Sig 1 to Sig 2, tented top, 2 vias
v8: diameter 29.53, hole 10, PWR (3V3) to Sig 3, 2 vias
v9: diameter 29.53, hole 10, Sig 1 to Sig 3, tented top, 1 vias
v10: diameter 20, hole 10, PWR (3V3) to Sig 3, tented top, 1 vias
v11: diameter 50, hole 28, Sig 1 to PWR (3V3), 1 vias
v12: diameter 29.53, hole 10, GND 2 to Sig 3, 1 vias
v13: diameter 157.48, hole 145, Sig 1 to Sig 3, 1 vias

## Nets (pads, with @x,y where several pads share a name; then routed paths per layer and width w, separated by ;. In a path a pad name is that pad's centre, name@x,y a point inside that pad or via, vN(x,y) a via of type N, cw(c..) or ccw(c..) an arc to the next point about the centre after c; other vN are vias at no path point)
+3V3: C1.1 C2.1 C11.1 J1.06_1 J1.06_2 R1.2 R2.2 R3.2 R27.2 U1.15 U1.16 U2.2 U5.4 | length 796.2
  Sig 1 w10: U2.2@1115.15,2299.13 U2.2 ; v1(1545,2775) 1560.63,2775 1580.36,2755.28 R27.2 ; v3(1550,2975) v3@1551.54,2973.46 ; U5.4 U5.4@1558.36,2937.77 ; C11.1 1570.04,3045 v11(1640,3045)
  Sig 1 w12: v4@1293.35,2241.65 v4(1300,2235)
  Sig 1 w15: v2(1041.58,2299.13) U2.2@1115.15,2299.13 ; U5.4 v3@1551.54,2973.46
  Sig 3 w10: v10(1170,2380) 1171.68,2378.32 1218.32,2378.32 R1.2 R3.2 R2.2 ; J1.06_1 v4(1300,2235) ; C2.1 1385,1059.53 v5(1385,1020) ; U1.16 1529.34,1125 U1.16@1535.63,1118.71 ; C1.1@1569.53,1061.97 C1.1 1570,1059.53 v5(1570,1020)
  Sig 3 w15: v4(1550.91,2235) J1.06_2
  other v8: 1480,1125 1480,1175
+5V0: *1.10 C3.2 C10.1 R25.2 U3.3 U4.4 | length 4113.8
  Sig 1 w7: U4.4 U4.4@1205.83,2947.76
  Sig 1 w10: U3.3@1102.01,1328.7 1175.94,1254.76 1388.11,1254.76 1410,1232.87 C3.2 ; R25.2 R25.2@1286.26,2795.38
  Sig 1 w15: U3.3 1102.01,1328.7 1102.01,1288.01 v1(1089,1275) 1187.46,1176.54 1233.46,1176.54 1345,1065 1605,1065 1650,1110 *1.10 ; U4.4@1205.83,2947.76 1205.83,2973.18 1237.65,3005 ; C10.1 1237.65,3005 ; R25.2@1286.26,2795.38 1290.88,2800 v1(1350,2800) 1350,2735 1315,2700 1110,2700 1040,2770 1040,3000.46 1044.54,3005 1237.65,3005
  PWR (3V3) w15: v1(1089,1275) 1020,1275 1000,1295 1000,2680 1020.16,2700.16 1315.16,2700.16 1350,2735 v1(1350,2800)
ADC_CS: U1.10 U2.29 | length 1058.9
  Sig 1 w10: U2.29 v1@1939.52,1900
  Sig 1 w15: v1@1939.52,1900 1940.51,1900.99 1944.04,1900.99 v1(1945,1901.94)
  Sig 3 w10: U1.10 1496.32,1425 1490.03,1431.29 1490.03,1445.31 1469.14,1466.21 1469.14,1484.49 1574.64,1590 1940,1590 1945,1595 v1(1945,1901.94)
AI0: *1.1 R4.1 | length 679.1
  Sig 1 w15: *1.1 v2(1899.93,1160)
  Sig 3 w15: R4.1 1655.59,1029.41 1695.69,989.31 1945.27,989.31 1950.69,994.73 1950.69,1145.22 1938.69,1157.22 1902.71,1157.22 v2(1899.93,1160)
AI0_3V3: R4.2 R5.2 U1.1 | length 429.6
  Sig 2 w15: v2(1360,1125) 1385,1150 1555,1150 1575,1130 v1(1575,1107.5)
  Sig 3 w15: R5.2 1197.56,1108.94 1213.62,1125 U1.1 ; v1(1575,1107.5) 1576.35,1107.5 1578.85,1105 R4.2
AI1: *1.2 R6.1 | length 655.2
  Sig 1 w15: *1.2 1818.35,1239.37 v2(1899.93,1239.37)
  Sig 3 w15: R6.1 1659.9,1165.69 1659.9,1145.1 1680,1125 1680,1040 1705,1015 1862.24,1015 1867.66,1020.42 1867.66,1207.11 v2(1899.93,1239.37)
AI1_3V3: R6.2 R7.2 U1.2 | length 395.8
  Sig 2 w15: v2(1361.55,1185.58) 1365.48,1185.58 1372.64,1192.74 1377.74,1192.74 1385,1200 1543.65,1200 1554.63,1189.02 1560.26,1189.02 v1(1577.6,1171.68)
  Sig 3 w15: R7.2 1200.91,1173.35 1328.35,1173.35 U1.2 ; v1(1577.6,1171.68) 1578.95,1171.68 1580.63,1170 R6.2
AI2: *1.3@1817.72,1317.48 R8.1 | length 171.4
  Sig 3 w15: R8.1 1655.59,1232.02 1659.9,1227.71 1678.4,1227.71 1683.61,1222.5 1712.5,1222.5 1748.19,1258.19 1748.19,1278.19 v2(1775,1305)
AI2_3V3: R8.2 R9.2 U1.3 | length 399.3
  Sig 2 w15: v2(1360,1225) 1385,1250 1559.17,1250 v1(1575,1234.17)
  Sig 3 w15: R9.2 1197.56,1231.28 1203.84,1225 U1.3 ; v1(1575,1234.17) R8.2
AI3: *1.4 R10.1 | length 196.7
  Sig 3 w15: R10.1 1673.52,1298.33 1686.64,1285.22 1713.36,1285.22 1732.26,1304.12 1732.26,1360.77 v2(1767.72,1396.22)
AI3_3V3: R10.2 R11.2 U1.4 | length 389.7
  Sig 2 w15: v2(1364.82,1284.53) 1368.75,1284.53 1382.55,1298.33 v1(1575,1298.33)
  Sig 3 w15: R11.2 1197.56,1294.4 1216.96,1275 U1.4 ; v1(1575,1298.33) R10.2
AI4: *1.5 R12.1 | length 306.8
  Sig 1 w10: *1.5@1789.76,1474.96 *1.5
  Sig 1 w15: v2(1740,1505) 1742.78,1502.22 1756.01,1502.22 1783.27,1474.96 *1.5@1789.76,1474.96
  Sig 2 w15: v1(1682.4,1360) 1709.41,1360 1735.45,1386.05 1735.45,1446.28 1745,1455.83 1745,1475.95 1741.71,1479.24 1741.71,1503.29 v2(1740,1505)
  Sig 3 w15: R12.1 1657.13,1360.96 1681.45,1360.96 v1(1682.4,1360)
AI4_3V3: R12.2 R13.2 U1.5 | length 410.2
  Sig 2 w15: v2(1360,1325) 1385,1350 1562.5,1350 v1(1575,1362.5)
  Sig 3 w15: R13.2 1197.56,1358.56 1231.12,1325 U1.5 ; v1(1575,1362.5) R12.2
AI5: *1.6 R14.1 | length 66.7
  Sig 3 w15: R14.1 1655.59,1430.6 1699.95,1474.96 v9(1700,1474.96)
AI5_3V3: R14.2 R15.2 U1.6 | length 452
  Sig 2 w15: v2(1390,1382.26) 1407.74,1400 1548.33,1400 v1(1575,1426.67)
  Sig 3 w15: R15.2 1197.56,1422.73 1245.29,1375 1378.81,1375 1386.07,1382.26 v2(1390,1382.26) ; v1(1575,1426.67) R14.2
AI6: *1.7 R16.1 | length 189.5
  Sig 2 w15: v1(1691.01,1515) 1667.74,1491.73 1667.74,1461.6 1700,1429.33 v2(1700,1396.22)
  Sig 3 w15: R16.1 1655.59,1494.77 1674.86,1514.04 1690.05,1514.04 v1(1691.01,1515)
AI6_3V3: R16.2 R17.2 U1.7 | length 433.7
  Sig 2 w15: v2(1360,1425) 1385,1450 1534.17,1450 v1(1575,1490.83)
  Sig 3 w15: R17.2 1197.56,1486.9 1259.46,1425 U1.7 ; v1(1575,1490.83) R16.2
AI7: *1.8 R18.1 | length 311
  Sig 2 w15: v1(1685,1555) 1654.9,1524.9 1654.9,1505.05 1649.24,1499.39 1649.24,1453.93 1654.9,1448.27 1654.9,1348.61 1671.01,1332.5 1681.05,1332.5 1696.07,1317.48 v2(1700,1317.48)
  Sig 3 w15: R18.1 v1(1685,1555)
AI7_3V3: R18.2 R19.2 U1.8 | length 445.4
  Sig 2 w15: v2(1360,1475) 1385,1500 1520,1500 v1(1575,1555)
  Sig 3 w15: R19.2 1197.56,1551.06 1273.62,1475 U1.8 ; v1(1575,1555) R18.2
BATT_IN: "Batt In1.2" C6.2 C7.2 C8.1 C9.1 U4.2 U4.3 U5.2 U5.3 | length 938.9
  Sig 1 w7: C8.1 C8.1@1346.97,2880.47
  Sig 1 w10: U4.2 U4.3 1267.05,2879.41 C6.2 ; C6.2@1280.83,2879.41 C6.2@1281.89,2880.47 ; U5.3 1561.3,2868.07 1589.05,2868.07 ; U5.2@1559.5,2846.4 1583.35,2846.4
  Sig 1 w12: C6.2@1281.89,2880.47 C8.1 ; C8.1@1346.97,2880.47 1398.45,2931.95 1398.45,2958.45 1440,3000 1591.44,3000 1595.98,2995.46 1595.98,2881.65 1596.09,2881.53 1596.09,2875.11 1595.98,2875 ; U5.2 U5.2@1559.5,2846.4 ; 1583.35,2846.4 1595.98,2859.03 ; 1589.05,2868.07 1595.98,2875 ; 1820,2890 1773.19,2843.19 C9.1 1641.18,2843.19 C7.2 1629.88,2854.49 1600.52,2854.49 1595.98,2859.03 ; 1595.98,2859.03 1595.98,2875
DEBUG_DATA: U2.11 U3.2 | length 401.9
  Sig 1 w10: U3.2@1100.21,1533.26 1076.74,1533.26 1060.42,1549.58 1060.42,1844.58 1065.84,1850 U2.11
  Sig 1 w15: U3.2@1100.21,1533.26 U3.2
EN: J1.02_1 J1.02_2 R1.1 R20.2 U2.3 | length 1647.9
  Sig 1 w10: U2.3 1127.83,2250 1156.05,2250 ; v3(1180,2325) 1160,2305 1160,2253.95 1156.05,2250 ; v3(1195,1855) 1175,1875 1175,2231.05 1156.05,2250 ; R20.2 1542.28,1561.17 1570.05,1588.94 1693.94,1588.94 1725,1620 1725,1700 1650,1775 v2(1650,1810)
  Sig 3 w10: v3(1180,2325) 1180.82,2324.18 1219.18,2324.18 R1.1 ; J1.02_1 J1.02_2
GND: "Batt In1.1" *1.9 BOOT1.1 BOOT1.2 C1.2 C2.2 C3.1 C4.1 C5.1 C6.1 C7.1 C8.2 C9.2 C10.2 C11.2 EN1.1 EN1.2 J1.05_1 J1.05_2 R5.1 R7.1 R9.1 R11.1 R13.1 R15.1 R17.1 R19.1 R23.1 R24.2 R26.2 U1.9 U1.14 U2.1 U2.15 U2.38 U2.39_1 U2.39_2 U2.39_3 U2.39_4 U2.39_5 U2.39_6 U2.39_7 U2.39_8 U2.39_9 U2.39_10 U2.39_11 U2.39_12 U2.39_13 U2.39_14 U2.39_15 U2.39_16 U2.39_17 U2.39_18 U2.39_19 U2.39_20 U2.39_21 U3.1 U4.10 U4.10_2 U4.10_3 U4.10_4 U5.10 U5.10_3 U5.10_4 | length 372.4
  Sig 1 w10: BOOT1.2 1284.53,1220.51 1349.22,1155.82 1403.46,1155.82 C3.1 ; C6.1 1281.89,2939.53 C8.2 ; U2.39_4 U2.39_15 U2.39_5 U2.39_16 U2.39_6
  other v12: 1480,1225
  other v13: 1840,3065
GPIO0: R2.1 R21.2 U2.25 | length 1024.6
  Sig 1 w15: v3(1685,2325) 1685,1780 1765,1700 U2.25
  Sig 3 w10: R2.1 1453.02,2323.36 R2.1@1453.84,2324.18 ; R21.2 1494.66,2365 R2.1@1453.84,2324.18 ; v3(1685,2325) 1684.18,2324.18 R2.1@1453.84,2324.18
GPIO0_SW: BOOT1.3 J1.01_2 R21.1 | length 1986.7
  Sig 1 w10: BOOT1.3 1069.68,1088 1057.66,1088 1040,1105.66 1040,1391.05 1043.95,1395 1166.05,1395 1170,1398.95 1170,1665 1240,1735 v2(1535,1735)
  Sig 3 w10: v2(1535,1735) J1.01_2 1635.83,1735 1710,1809.17 1710,2335.36 1693.66,2351.69 1602.83,2351.69 1592.28,2362.24 R21.1
GPIO2: R3.1 R22.2 U2.24 | length 1423.2
  Sig 1 w15: v3(1645,2290) 1615,2260 1615,1770 1685.51,1699.49 U2.24
  Sig 3 w10: R22.2 1162.28,2167.28 1175,2180 1175,2255 1195,2275 1286.64,2275 R3.1 1368.36,2290 v3(1645,2290)
GPIO2_SW: BOOT1.4 J1.01_1 R22.1 | length 1627.6
  Sig 1 w10: v1(1245,1000) 1246.91,1001.91 1246.91,1008.3 1247.56,1008.95 1247.56,1080.12 BOOT1.4
  Sig 3 w10: R22.1 1025,1924.17 J1.01_1@1214.17,1735 ; J1.01_1 J1.01_1@1214.17,1735 ; v1(1245,1000) 1100,1000 1015,1085 1015,1675 1075,1735 J1.01_1@1214.17,1735
MISO: U1.12 U2.31 | length 1197.2
  Sig 1 w10: U2.31 v1(1865,2000)
  Sig 3 w10: U1.12 1496.71,1325 1490.41,1331.29 1490.41,1345.31 1442.14,1393.59 1442.14,1495.68 1566.46,1620 1905,1620 1905,1985 1890,2000 v1(1865,2000)
MOSI: U1.11 U2.37 | length 1449
  Sig 1 w10: U2.37 v3(1865,2300)
  Sig 3 w10: U1.11 1496.71,1375 1490.41,1381.29 1490.41,1395.31 1455.64,1430.09 1455.64,1490.08 1570.55,1605 1920,1605 1920,2260 1880,2300 v3(1865,2300)
NetC4_2: C4.2 U4.8 U4.11 | length 701.7
  Sig 1 w10: v1(1076,2800.71) 1076,2801.25 1084.83,2810.08 1084.83,2823.58 1089.09,2827.83 U4.8 ; C4.2 1289.9,3050 1311.69,3028.21 1311.69,2981.79 1306.71,2976.81 1273.69,2976.81 1249.77,2952.89 1249.77,2926.75 1228.55,2905.53 1195.9,2905.53 1174.68,2884.31 U4.11 1174.68,2813.07 1185.79,2801.97 1227.49,2801.97 1229.46,2800 v1(1230,2800)
  PWR (3V3) w10: v1(1076,2800.71) 1093.22,2800.71 1095.5,2798.43 1162.78,2798.43 1164.35,2800 v1(1230,2800)
NetC5_2: C5.2 U5.8 | length 83.7
  Sig 1 w7: C5.2 1411.26,2757.24 1423.51,2769.49 1423.51,2802.95 1435.16,2814.61 U5.8
NetEN1_3: EN1.3 EN1.4 R20.1 | length 244.2
  Sig 1 w15: EN1.4 EN1.3 1473.9,1342.87 1477.72,1339.06 R20.1
NetR23_2: R23.2 U5.11 | length 138.7
  Sig 1 w7: U5.11 1523.98,2801.7 1527.32,2798.35 1582.61,2798.35 1608.25,2772.72 R23.2
NetR24_1: R24.1 R25.1 U4.9 | length 242.8
  Sig 1 w7: U4.9 1138.31,2820.9 U4.9@1138.31,2809.45 ; R24.1@1205.53,2767.49 1214.47,2758.55 1215,2758.02 R24.1
  Sig 1 w10: U4.9 1135.32,2799.68 1146.53,2788.47 1201.53,2788.47 1214.47,2775.53 1214.47,2758.55 1214.47,2755.53 R24.1 1215,2751.98 1223.62,2743.36 R25.1
NetR26_1: R26.1 R27.1 U5.9 | length 164
  Sig 1 w7: U5.9 1484.61,2782.06 1525.93,2740.74 R26.1 1542.82,2737.69 1557.99,2722.53 1580.36,2700.16 R27.1
NetU4_5: U4.5 U4.6 | length 69.4
  Sig 1 w7: U4.5@1105,2941.42 U4.5 ; U4.6@1113.66,2879.41 U4.6@1114.58,2880.33
  Sig 1 w12: U4.6 1099.88,2902.81 1105,2907.93 U4.5@1105,2941.42
NetU5_5: U5.5 U5.6 | length 66.2
  Sig 1 w7: U5.6 1455,2872.01 U5.5@1455,2930
PROGRX: J1.03_1 J1.03_2 U2.34 | length 778.3
  Sig 1 w10: U2.34 1810,2155 v7(1865,2155)
  Sig 2 w10: v6(1655,1955) 1655,1975 1835,2155 v7(1865,2155)
  Sig 3 w10: J1.03_1 1249.02,1935 1279.02,1905 1570.98,1905 1600.98,1935 J1.03_2
PROGTX: J1.04_1 J1.04_2 U2.35 | length 784
  Sig 1 w10: U2.35 v7(1865,2200)
  Sig 2 w10: v6(1650,2055) 1795,2200 v7(1865,2200)
  Sig 3 w10: J1.04_1 1249.02,2035 1324.02,1960 1525.98,1960 1600.98,2035 J1.04_2
SCK: U1.13 U2.30 | length 1183.7
  Sig 1 w10: U2.30 v1(1865,1950)
  Sig 3 w10: U1.13 1496.71,1275 1490.41,1281.29 1490.41,1295.31 1428.64,1357.09 1428.64,1501.27 1562.37,1635 1890,1635 1890,1940 1880,1950 v1(1865,1950)
pads on no net: *1.3@1733.86,1199.37 *1.3@1733.86,1435.59 BOOT1.5 BOOT1.6 BOOT1.7 BOOT1.8 BOOT1.9 BOOT1.10 BOOT1.11 BOOT1.12 EN1.5 EN1.6 EN1.7 EN1.8 EN1.9 EN1.10 EN1.11 EN1.12 U2.4 U2.5 U2.6 U2.7 U2.8 U2.9 U2.10 U2.12 U2.13 U2.14 U2.16 U2.17 U2.18 U2.19 U2.20 U2.21 U2.22 U2.23 U2.26 U2.27 U2.28 U2.32 U2.33 U2.36 U3.4 U4.1 U4.3_1 U4.3_2 U4.4_1 U4.4_2 U4.4_3 U4.4_4 U4.4_5 U4.5_1 U4.5_2 U4.5_3 U4.5_4 U4.5_5 U4.6_1 U4.6_2 U4.7 U4.10_1 U4.10_5 U5.1 U5.3_1 U5.3_2 U5.4_1 U5.4_2 U5.4_3 U5.4_4 U5.4_5 U5.5_1 U5.5_2 U5.5_3 U5.5_4 U5.5_5 U5.6_1 U5.6_2 U5.7 U5.10_1 U5.10_2 U5.10_5

## Polygon pours and split planes (outlines as drawn)
GND on GND 2 "GND_L05_P000" (solid, pour order 0): 970,970 1970,970 1970,3175 970,3175
GND on GND 1 "GND_L02_P001" (solid, pour order 1): 970,970 1970,970 1970,3175 970,3175
+3V3 on PWR (3V3) "+3V3_L04_P002" (solid, pour order 2): 970,970 1970,970 1970,3175 970,3175
GND on Sig 3 "GND_L06_P008" (solid, remove dead copper, pour order 8): 970,970 1970,970 1970,3175 970,3175
GND on Sig 1 "GND_L01_P007" (solid, remove dead copper, pour order 7): 970,970 1970,970 1970,3175 970,3175

## Keep-outs
Keep-Out Layer:
  region: 1820,2650 1100,2650 1100,2385 1820,2385

## Silkscreen, mask and mechanical layers (free items; w line width, h text height)
Top Overlay:
  text "ArmbandController_RevA - Senior Design - Raheel Farouk" at 1951.85,1000 h70 r90
Mechanical 1:
  the board outline again, w10

## Text inside footprints (layer, text, board x,y; h text height)
U2: Top 3D Body "ANTENNA" at 1224.29,2497.24 h70